# Altium PCB MiniPrinter1.0..PcbDoc
Units mm, origin at the board's own origin, x right, y up, seen from the top; angles counter-clockwise.
Board outline 80.2 x 48.2 mm, 2 copper layers (Top Layer, Bottom Layer); 24 components, 29 nets, 106 pads, 10 vias.
Unrouted connection lines stored in the file: 1.
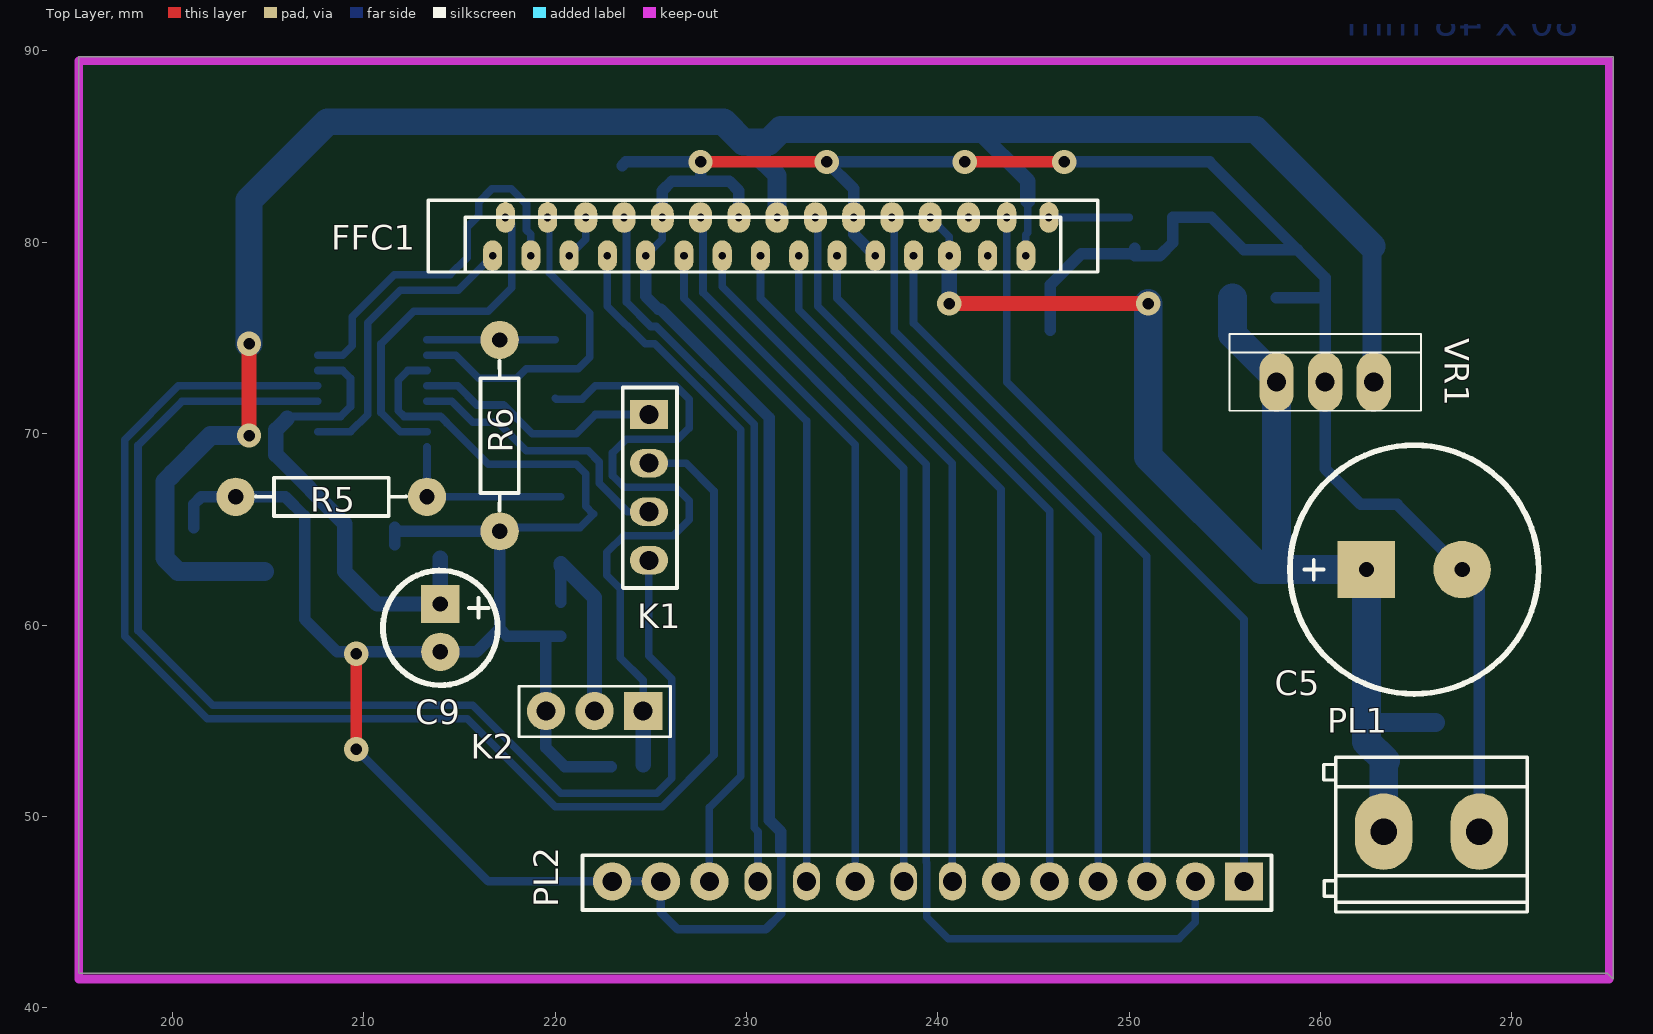
[diagram p0: Top Layer view]
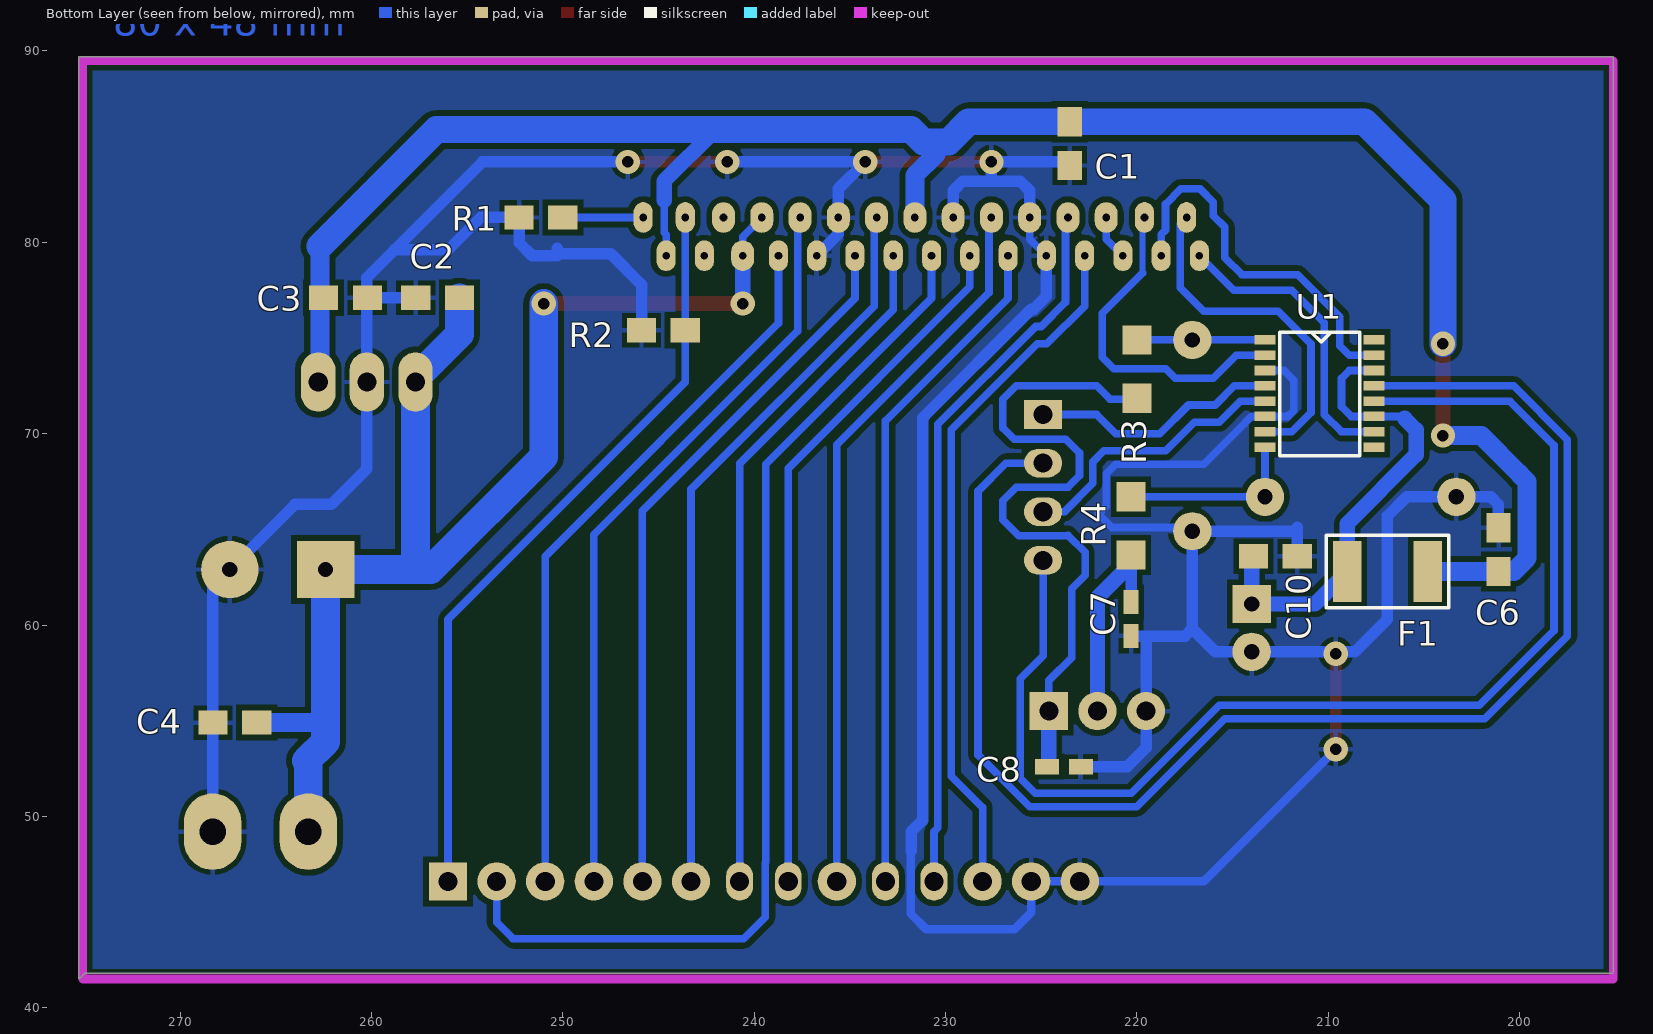
[diagram p1: Bottom Layer view, seen from below]

## Layer stack, top to bottom
Top Layer: signal copper 0.0356
Dielectric: dielectric 0.32, FR-4, Dk 4.8
Bottom Layer: signal copper 0.0356

## Board outline
195.1,89.7 275.3,89.7 275.3,41.5 275,41.8 195.1,41.8

## Design rules (kind name [scope] priority, off if disabled: settings)
Clearance [All] p1: gap=0.3
PolygonConnect [All] p1: connectstyle=Relief reliefconductorwidth=0.254 reliefentries=4 polygonreliefangle="90 Angle" airgapwidth=0.254
RoutingVias [All] p1: holewidth=0.711 width=1.27 viastyle="Through Hole" minholewidth=0.711 minwidth=1.27 maxholewidth=0.711 maxwidth=1.27
SolderMaskExpansion [All] p1: expansion=0.102
Width [All] p1: maxlimit=10 minlimit=0.1 preferedwidth=0.5
28 further rules are at their usual default settings.

## Components (designator, comment, footprint, x,y, rotation, side; value= is the part's Value field where it differs from the comment)
C1 "100n" "SM 0805" 223.5,86.3 r270 bottom
C2 "100n" "SM 0805" 255.4,77.1 r0 bottom
C3 "100n" "SM 0805" 262.5,77.1 r180 bottom
C4 "100n" "SM 0805" 266,54.9 r0 bottom
C5 "470u 16V" "CAP RADIAL 5/13" 262.4,62.9 r180 top
C6 "100n" "SM 0805" 201.1,62.8 r90 bottom
C7 "470p" "SM 0603" 220.3,61.2 r270 bottom
C8 "470p" "SM 0603" 224.7,52.6 r180 bottom
C9 "100u 16V" "CAP RADIAL 2.5/6" 214,61.1 r90 top
C10 "100n" "SM 0805" 213.9,63.6 r180 bottom
F1 "POLYFUSE 1A" MSF110 204.8,62.8 r0 bottom
FFC1 "CON30" FFC30-1.0-TH-ZIF 245.8,81.3 r90 top
K1 "CON4" SIL4 224.9,71 r270 top
K2 "CON3" SIL3 224.6,55.5 r180 top
PL1 "CON2" DG127-5.0-2 263.3,49.2 r0 top
PL2 "CON14" SIL14 256,46.6 r180 top
R1 "100R" "SM 0805" 250,81.3 r0 bottom
R2 "15k" "SM 0805" 243.6,75.4 r0 bottom
R3 "1k" "SM 1206" 220,74.9 r270 bottom
R4 "1k" "SM 1206" 220.3,66.7 r270 bottom
R5 "1R" "RES 1/4W H" 203.3,66.7 r0 top
R6 "1R" "RES 1/4W H" 217.1,64.9 r90 top
U1 "BA6845" "SSOP-A16 (ROHM)" 213.3,74.9 r180 bottom
VR1 "7805" TO-220V 257.7,72.7 r0 top

## Footprints (in the part's own frame and the unit in brackets; to place one, negate y for a bottom-side part, rotate by r counter-clockwise, add the part's x,y. Pads: shape width x height; smd on the part's side, far side on the other; paste and mask are expansions set on the pad)
"CAP RADIAL 2.5/6" [mm]
  rect 2x2 hole 0.8: 1(0,0)
  round 2 hole 0.8: 2(-2.5,0)
  silkscreen extent -4.25,-3 1.75,3
"CAP RADIAL 5/13" [mm]
  rect 3x3 hole 0.8: 1(0,0)
  round 3 hole 0.8: 2(-5,0)
  silkscreen extent -9,-6.5 4,6.5
DG127-5.0-2 [mm] "DEGSON DG127 5.0mm PITCH PCB SCREW TERMINAL"
  oval 3x4 hole 1.4: 1(0,0) 2(5,0)
  silkscreen extent -3.12,-4.2 7.5,3.9
FFC30-1.0-TH-ZIF [mm] "FFC 1.0mm PITCH THROUGH HOLE ZIF"
  oval 1.6x1 hole 0.4: 1(0,0) 2(-2,1.2) 3(0,2.2) 4(-2,3.2) 8(-2,7.07) 10(-2,9.07) 12(-2,11.07) 14(-2,13.07) 16(-2,15.07) 18(-2,17.07) 20(-2,19.07) 22(-2,21.07) 24(-2,23.07) 26(-2,25.07) 27(0,26.2) 28(-2,27.07) 29(0,28.4) 30(-2,29.07)
  oval 1.6x1.2 hole 0.4: 5(0,4.2) 6(-2,5.2) 7(0,6.2) 9(0,8.2) 11(0,10.2) 13(0,12.2) 15(0,14.2) 17(0,16.2) 19(0,18.2) 21(0,20.2) 23(0,22.2) 25(0,24.2)
  silkscreen extent -2.85,-2.55 0.91,32.43
MSF110 [mm]
  rect 1.5x3.2 smd: 1(0,0) 2(4.2,0)
  silkscreen extent -1.09,-1.9 5.31,1.89
"RES 1/4W H" [mm]
  round 2 hole 0.8: 1(0,0) 2(10,0)
  silkscreen extent 1.07,-1 8.91,1
SIL3 [mm]
  rect 2x2 hole 1: 1(0,0)
  round 2 hole 1: 2(2.54,0) 3(5.08,0)
  silkscreen extent -1.42,-1.3 6.49,1.34
SIL4 [mm]
  rect 1.5x2 hole 1: 1(0,0)
  oval 1.5x2 hole 1: 2(2.54,0) 3(5.08,0) 4(7.62,0)
  silkscreen extent -1.43,-1.37 9.06,1.47
SIL14 [mm]
  rect 2x2 hole 1: 1(0,0)
  round 2 hole 1: 2(2.54,0) 3(5.08,0) 4(7.62,0) 5(10.16,0) 6(12.7,0) 9(20.32,0) 12(27.94,0) 13(30.48,0) 14(33.02,0)
  oval 1.4x2 hole 1: 7(15.24,0) 8(17.78,0) 10(22.86,0) 11(25.4,0)
  silkscreen extent -1.43,-1.37 34.57,1.51
"SM 0603" [mm]
  rect 1.27x0.8 smd: 1(0,0) 2(1.778,0)
"SM 0805" [mil]
  rect 60x50 smd: 1(0,0) 2(90,0)
"SM 1206" [mil]
  rect 60x60 smd: 1(0,0) 2(120,0)
"SSOP-A16 (ROHM)" [mm]
  rect 1.1x0.5 smd: 1(0,0) 2(0,-0.8) 3(0,-1.6) 4(0,-2.4) 5(0,-3.2) 6(0,-4) 7(0,-4.8) 8(0,-5.6) 9(5.7,-5.6) 10(5.7,-4.8) 11(5.7,-4) 12(5.7,-3.2) 13(5.7,-2.4) 14(5.7,-1.6) 15(5.7,-0.8) 16(5.7,0)
  silkscreen extent 0.76,-6.05 4.96,0.4
TO-220V [mm]
  oval 1.8x3.1 hole 1: 1(0,0) 2(2.54,0) 3(5.08,0)
  silkscreen extent -2.45,-1.5 7.55,2.5

## Part data
C1 C2 C3 C4 C6 C7 C8 C10: library part CAPACITOR
C5 C9: library part POL_CAP
F1: library part FUSE, "Fuse"
K1: "4 Way Connector"
K2: "3 Way Connector"
PL1: "2 Way connector"
PL2: "14 Way Connector"
R1 R2 R3 R4 R5 R6: library part RES
VR1: library part "REG 78XX", "Fixed voltage regulator"

## Via types
v1: diameter 1.27, hole 0.6, Top Layer to Bottom Layer, 10 vias

## Nets (pads, with @x,y where several pads share a name; then routed paths per layer and width w, separated by ;. In a path a pad name is that pad's centre, name@x,y a point inside that pad or via, vN(x,y) a via of type N, cw(c..) or ccw(c..) an arc to the next point about the centre after c; other vN are vias at no path point)
+5V: C1.1 C3.1 C6.1 F1.1 FFC1.2 FFC1.15 VR1.3 | length 110.4
  Top Layer w0.8: v1(204,69.9) v1(204,74.7)
  Bottom Layer w0.4: FFC1.2 244.6,80.4 244.7,80.5 244.7,82.2
  Bottom Layer w0.8: 230.5,84.6 231.15,85.25 ; 242,85.9 244.7,83.2 244.7,82.2
  Bottom Layer w1: v1(204,69.9) 202,69.9 200.007,67.907 200.007,67.893 199.6,67.486 199.6,63.5 200.3,62.8 C6.1 F1.1 ; 230.5,84.6 231.6,83.5 FFC1.15 ; 262.7,79.8 262.7,72.78 VR1.3
  Bottom Layer w1.4: v1(204,74.7) 204,82.2 208.1,86.3 C1.1 228.8,86.3 229.85,85.25 231.15,85.25 231.8,85.9 242,85.9 256.6,85.9 262.7,79.8
+7V5: C2.1 C4.1 C5.1 FFC1.6 FFC1.7 FFC1.25 FFC1.26 PL1.1 VR1.1 | length 72.6
  Top Layer w0.8: v1(240.6,76.8) v1(251,76.8)
  Bottom Layer w0.4: FFC1.26 221.6,80.17 FFC1.25 ; FFC1.7 240.6,80.3 FFC1.6
  Bottom Layer w0.8: v1(240.6,76.8) FFC1.6
  Bottom Layer w1: 262.4,55.1 262.6,54.9 C4.1
  Bottom Layer w1.5: v1(251,76.8) 251,68.8 256.9,62.9 257.9,62.9 ; C2.1 255.4,75.2 257.7,72.9 VR1.1 257.7,63.1 257.9,62.9 ; PL1.1 263.3,52.8 263.4,52.9 262.4,53.9 262.4,55.1 C5.1 257.9,62.9
A1: K1.1 U1.4 | length 13
  Bottom Layer w0.4: U1.4 214.9,72.5 215.9,71.5 217.3,71.5 218.8,70 221.1,70 222.1,71 K1.1
A2: K1.2 U1.13 | length 75
  Bottom Layer w0.4: U1.13 200.31,72.5 197.5,69.69 197.5,59.41 201.81,55.1 215.41,55.1 220.01,50.5 225.59,50.5 228.3,53.21 228.3,67 226.84,68.46 K1.2
B1: K1.3 U1.5 | length 14.7
  Bottom Layer w0.4: U1.5 214.6,71.7 215.7,70.6 217,70.6 218.5,69.1 221.72,69.1 222.3,68.52 222.3,67.4 223.78,65.92 K1.3
B2: K1.4 U1.12 | length 63.7
  Bottom Layer w0.4: U1.12 200.5,71.7 198.2,69.4 198.2,59.7 202.1,55.8 215.7,55.8 220.3,51.2 225.3,51.2 226.1,52 226.1,57.2 224.9,58.4 K1.4
CLK: FFC1.9 PL2.4 | length 39.2
  Bottom Layer w0.4: FFC1.9 237.73,81.17 237.73,75.37 248.38,64.72 PL2.4
DI: FFC1.8 PL2.3 | length 37.7
  Bottom Layer w0.4: FFC1.8 238.73,75.77 250.92,63.58 PL2.3
DO: FFC1.24 PL2.12 | length 36.6
  Bottom Layer w0.4: FFC1.24 222.73,76.67 224.7,74.7 225.2,74.7 229.7,70.2 229.7,52.1 228.06,50.46 PL2.12
GND: C1.2 C2.2 C3.2 C4.2 C5.2 C6.2 C7.2 C8.2 C9.2 C10.2 FFC1.10 FFC1.11 FFC1.17 FFC1.21 FFC1.22 K2.3 PL1.2 PL2.13 PL2.14 R1.2 R2.2 R5.1 R6.1 U1.3 U1.6 VR1.2 | length 251.2
  Top Layer w0.6: v1(209.6,53.5) v1(209.6,58.5) ; v1(227.6,84.2) v1(234.2,84.2) ; v1(241.4,84.2) v1(246.6,84.2)
  Bottom Layer w0.4: U1.3 212.3,73.3 211.8,72.8 211.8,71.2 212.1,70.9 U1.6 214.007,70.9 214.35,70.557 214.35,70.55 216.5,68.4 221.1,68.4 221.6,67.9 221.6,66.2 222,65.8 221.3,65.1 217.3,65.1 R6.1 ; FFC1.22 225.6,80.17 FFC1.21
  Bottom Layer w0.45: v1(209.6,53.5) 216.5,46.6 PL2.14 PL2.13 225.52,44.98 226.4,44.1 231,44.1 231.825,44.925 231.825,48.175 231.8,48.2
  Bottom Layer w0.6: C6.2 201.1,66.3 201.5,66.7 R5.1 205.9,66.7 206.9,65.7 206.9,60.3 208.6,58.6 C9.2 215.9,58.6 217.1,59.8 ; C10.2@211.614,64.2 211.614,65.1 211.814,64.9 R6.1 217.1,59.8 ; C7.2 219.5,59.422 ; C8.2 220.5,52.6 219.52,53.58 K2.3 219.52,59.402 219.5,59.422 ; C1.2 223.686,84.2 v1(227.6,84.2) 227.6,83.2 ; FFC1.22 224.73,77.17 225.4,76.5 225.521,76.5 231.2,70.821 231.2,49.8 231.8,49.2 231.8,48.2 ; FFC1.21 225.6,82.7 226.1,83.2 227.6,83.2 ; FFC1.17 229.6,82.7 229.1,83.2 227.6,83.2 ; FFC1.10 235.6,80.43 FFC1.11 235.6,82.8 v1(234.2,84.2) v1(241.4,84.2) ; R2.2 245.886,77.786 247.5,79.4 250.2,79.4 ; v1(246.6,84.2) 254.2,84.2 258.8,79.6 ; 250.3,79.7 250.3,79.3 251.6,79.3 252.286,79.986 R1.2 254.3,81.3 256,79.6 258.8,79.6 ; C2.2 C3.2 C3.2@260.24,77.074 ; PL1.2 268.3,62 C5.2 264,66.3 262.1,66.3 260.24,68.16 VR1.2 C3.2@260.24,77.074 ; 217.1,59.8 217.478,59.422 219.5,59.422 ; 258.8,79.6 260.24,78.16 C3.2@260.24,77.074
I1: C8.1 K2.1 R3.2 | length 37.3
  Bottom Layer w0.4: R3.2 220.052,71.8 221.4,71.8 222.1,72.5 226.3,72.5 227,71.8 227,70.3 226.41,69.71 223.71,69.71 223,69 223,67.8 223.6,67.2 226.3,67.2 227,66.5 227,65.5 226.17,64.67 223.63,64.67 223.6,64.7 222.7,63.8 222.7,62.6 223.4,61.9 223.4,58.3 224.6,57.1 K2.1
  Bottom Layer w0.8: C8.1@224.6,52.7 K2.1
I2: C7.1 K2.2 R4.2 | length 10.4
  Bottom Layer w0.6: C7.1 R4.2@220.3,63.1
  Bottom Layer w0.8: R4.2@220.3,63.1 220.3,63.2 222.06,61.44 K2.2
LATCH: FFC1.23 PL2.11 | length 37.8
  Bottom Layer w0.4: FFC1.23 223.73,81.17 223.73,76.87 225,75.6 225.29,75.6 230.4,70.49 230.4,49.4 230.6,49.2 PL2.11
MTA: FFC1.28 U1.15 | length 19.9
  Bottom Layer w0.4: U1.15 208.9,74.1 209.4,74.6 209.4,76.1 211.6,78.3 214.5,78.3 215.4,79.2 215.4,80.8 216,81.4 216,82.1 216.7,82.8 217.7,82.8 218.5,82 218.5,80.644 218.73,80.414 FFC1.28
MTA\: FFC1.27 U1.2 | length 17.7
  Bottom Layer w0.3: FFC1.27 219.7,81.2 219.7,78.4
  Bottom Layer w0.4: U1.2 214.8,74.1 216,72.9 218,72.9 218.5,73.4 221.2,73.4 221.8,74 221.8,76.3 219.7,78.4
MTB: FFC1.30 U1.10 | length 15.8
  Bottom Layer w0.4: U1.10 209.3,70.1 210.2,71 210.2,75.8 211.9,77.5 214.93,77.5 FFC1.30
MTB\: FFC1.29 U1.7 | length 18.3
  Bottom Layer w0.4: U1.7 211.9,70.1 210.9,71.1 210.9,74.7 212.6,76.4 216.5,76.4 217.73,77.63 217.73,80.97 FFC1.29
NetC9_1: C9.1 C10.1 F1.2 U1.11 U1.14 | length 25.4
  Bottom Layer w0.4: 205.5,70.4 206,70.9 U1.11 208.8,70.9 209.3,71.4 209.3,72.9 208.9,73.3 U1.14
  Bottom Layer w0.8: 206,70.8 205.4,70.2 205.4,68.9 209,65.3 F1.2 210.7,61.1 C9.1 C10.1@214,63.5
NetR3_1: R3.1 R6.2 U1.1 | length 6.7
  Bottom Layer w0.4: U1.1 R6.2 R3.1
NetR4_1: R4.1 R5.2 U1.8 | length 9.6
  Bottom Layer w0.4: U1.8 R5.2 R4.1
PHE: FFC1.3 PL2.1 R2.1 | length 39.8
  Bottom Layer w0.4: FFC1.3 R2.1 243.6,72.7 256,60.3 PL2.1
PHK: FFC1.1 R1.1 | length 4.2
  Bottom Layer w0.4: FFC1.1 R1.1
STB1: FFC1.20 PL2.10 | length 35.4
  Bottom Layer w0.4: FFC1.20 226.73,77.07 233.14,70.66 PL2.10
STB2: FFC1.19 PL2.9 | length 38
  Bottom Layer w0.4: FFC1.19 227.73,81.17 227.73,77.37 235.68,69.42 PL2.9
STB3: FFC1.18 PL2.8 | length 36.6
  Bottom Layer w0.4: FFC1.18 228.73,77.67 238.22,68.18 PL2.8
STB4: FFC1.14 PL2.7 | length 36
  Bottom Layer w0.4: FFC1.14 232.73,76.47 240.76,68.44 PL2.7
STB5: FFC1.13 PL2.6 | length 38.7
  Bottom Layer w0.4: FFC1.13 233.73,81.17 233.73,76.67 243.3,67.1 PL2.6
STB6: FFC1.12 PL2.5 | length 37.3
  Bottom Layer w0.4: FFC1.12 234.73,77.07 245.84,65.96 PL2.5
TM1: FFC1.16 PL2.2 | length 55.2
  Bottom Layer w0.4: FFC1.16 230.73,77.07 239.4,68.4 239.4,47.6 239.42,47.58 239.42,44.72 240.54,43.6 252.6,43.6 253.46,44.46 PL2.2
pads on no net: FFC1.4 FFC1.5 U1.9 U1.16

## Polygon pours and split planes (outlines as drawn)
GND on Bottom Layer "GND_PLANE" (solid, remove dead copper, pour order 2): 195.1,89.5 275.1,89.5 275.1,41.5 195.1,41.5

## Keep-outs
Keep-Out Layer:
  lines w0.45: 195.1,41.5 275.1,41.5 275.1,89.5 195.1,89.5 195.1,41.5

## Other copper
Bottom Layer:
  text "80 x 48 mm" at 273.5,90.3 h2.5

## Silkscreen, mask and mechanical layers (free items; w line width, h text height)
Mechanical 1:
  lines w0.45: 195.1,41.5 195.1,89.5 275.1,89.5 275.1,41.5 195.1,41.5